# Altium PCB Dragonfleye.PcbDoc
Units mil, origin at the board's own origin, x right, y up, seen from the top; angles counter-clockwise.
Board outline 787.11 x 669.29 mil, 4 copper layers (Component Side, Ground Plane, Power Plane, Solder Side), stack 66.034 mil thick; 62 components, 67 nets, 308 pads, 102 vias.
Unrouted connection lines stored in the file: 105.
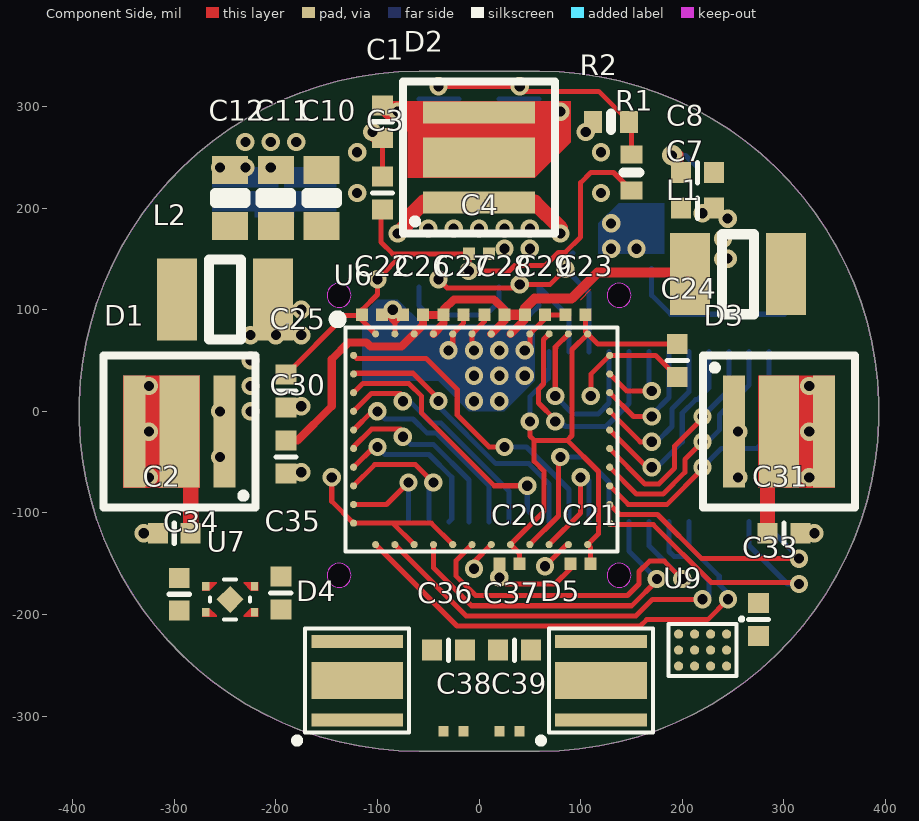
[diagram p0: Component Side view]
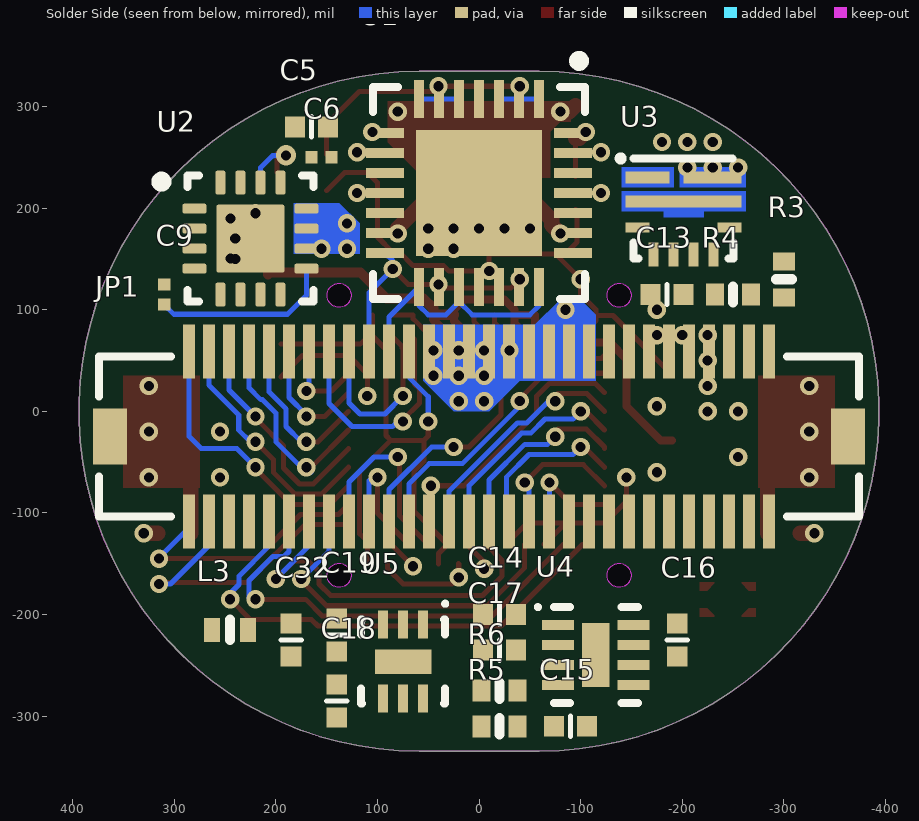
[diagram p1: Solder Side view, seen from below]
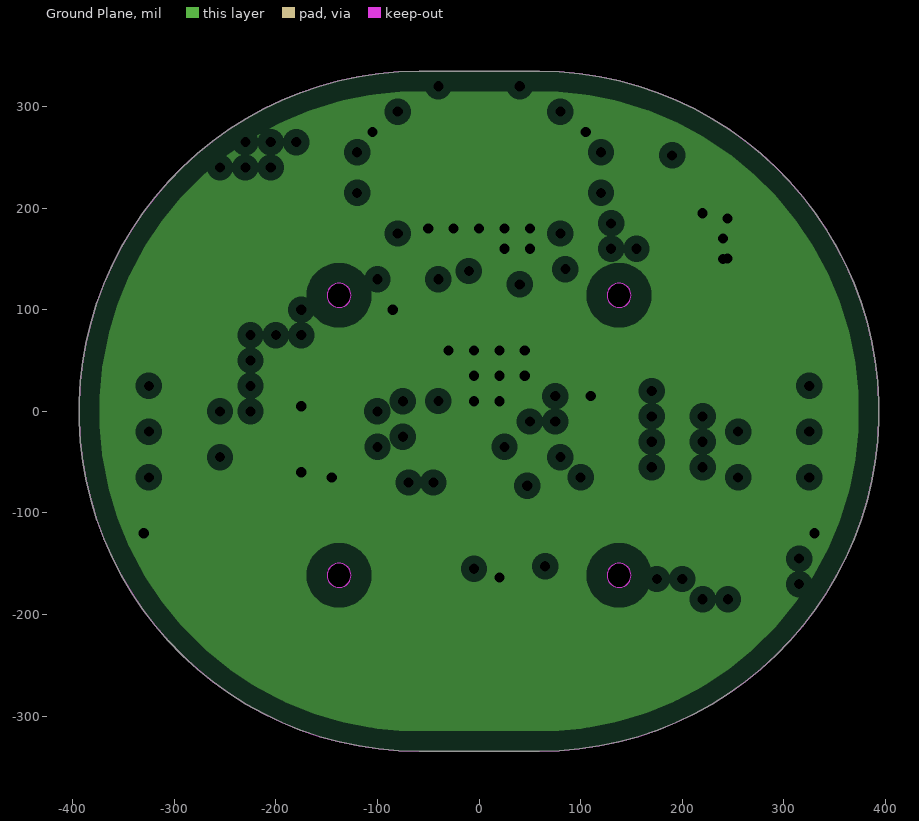
[diagram p2: Ground Plane, clearances drawn from the general rule]
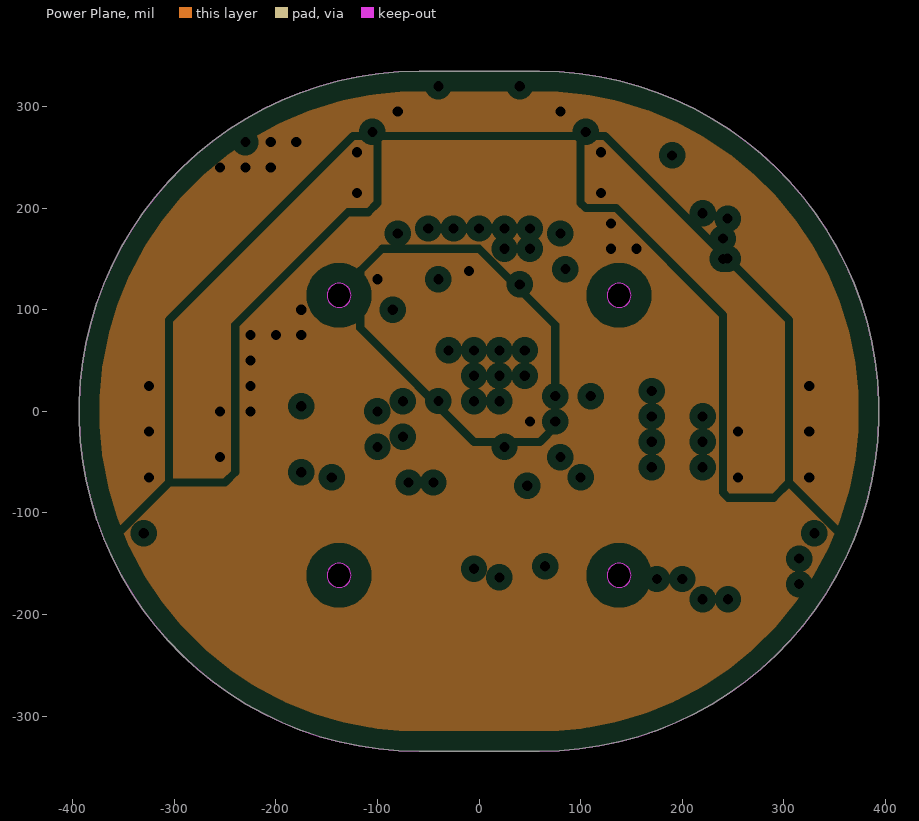
[diagram p3: Power Plane, clearances drawn from the general rule]

## Layer stack, top to bottom
Top Solder: solder mask 0.4, Solder Resist, Dk 3.5
Component Side: signal copper 1.4
Dielectric 1: core 6.7, FR-4, Dk 4.8
Ground Plane: plane copper 1.417, net GND
Dielectric 3: prepreg 47, Dk 4.2
Power Plane: plane copper 1.417, net (Multiple Nets)
Dielectric 4: core 6.7, Dk 4.2
Solder Side: signal copper 1.4
Bottom Solder: solder mask 0.4, Solder Resist, Dk 3.5

## Board outline
-59.06,-334.65 59.06,-334.65 ccw(c59.06,0) 59.06,334.65 -59.06,334.65 ccw(c-59.06,0)
cut-out: -149.61,114.17 ccw(c-137.8,114.17) -137.8,102.36 ccw(c-137.8,114.17) -125.98,114.17 ccw(c-137.8,114.17) -137.8,125.98 ccw(c-137.8,114.17)
cut-out: 125.98,114.17 ccw(c137.8,114.17) 137.8,102.36 ccw(c137.8,114.17) 149.61,114.17 ccw(c137.8,114.17) 137.8,125.98 ccw(c137.8,114.17)
cut-out: 125.98,-161.42 ccw(c137.8,-161.42) 137.8,-173.23 ccw(c137.8,-161.42) 149.61,-161.42 ccw(c137.8,-161.42) 137.8,-149.61 ccw(c137.8,-161.42)
cut-out: -149.61,-161.42 ccw(c-137.8,-161.42) -137.8,-173.23 ccw(c-137.8,-161.42) -125.98,-161.42 ccw(c-137.8,-161.42) -137.8,-149.61 ccw(c-137.8,-161.42)

## Design rules (kind name [scope] priority, off if disabled: settings)
Clearance [All] p1: gap=5 ignorepadtopadclearanceinfootprint=FALSE
ComponentClearance [All] p1: gap=5 collisioncheckmode=3 verticalgap=5 showdistances=FALSE
PlaneClearance [All] p1: clearance=8
PlaneConnect [All] p1: planeconnectstyle=Direct reliefexpansion=20 reliefentries=4 reliefconductorwidth=10 reliefairgap=10
PolygonConnect [All] p1: connectstyle=Relief reliefconductorwidth=10 reliefentries=4 polygonreliefangle="90 Angle" airgapwidth=10
RoutingVias [All] p1: holewidth=10 width=18 viastyle="Through Hole" minholewidth=10 minwidth=18 maxholewidth=10 maxwidth=20
SolderMaskExpansion SolderMaskExpansion_Via [IsVia] p1: expansion=1 soldermaskfromhole=TRUE
SolderMaskExpansion [All] p2: expansion=3
Width [All] p1: maxlimit=20 minlimit=5 preferedwidth=5
27 further rules are at their usual default settings.

## Classes and differential pairs
component class U_Sensor-RGB: C36 C37 C38 C39 U8
component class U_Sensor-ToF: C20 C21 C22 C23 C24 C25 C26 C27 C28 C29 C30 U6
component class U_Power: C5 C6 C7 C8 C9 C10 C11 C12 C13 C14 C15 C16 C17 C18 C19 C34 C35 L1 L2 R3 R4 R5 R6 U2 U3 U4 U5 U7
component class U_LEDs: C1 C2 C3 C4 C31 C32 C33 D1 D2 D3 D4 D5 L3 R1 R2 U1 U9
component class U_Connector: JP1

## Components (designator, comment, footprint, x,y, rotation, side; value= is the part's Value field where it differs from the comment)
C1 "10uF 6.3V 0402" C0402[1005X55] -95,285 r90 top value=10uF
C2 "10uF 6.3V 0402" C0402[1005X55] -300,-120 r0 top value=10uF
C3 "10uF 6.3V 0402" C0402[1005X55] -95,215 r270 top value=10uF
C4 "0.1uF 6.3V 0201" C0201[0603X30]#1 0,155 r180 top value=0.1uF
C5 "10uF 6.3V 0402" C0402[1005X55] 165,280 r180 bottom value=10uF
C6 "0.1uF 6.3V 0201" C0201[0603X30]#1 155,250 r180 bottom value=0.1uF
C7 "10uF 6.3V 0402" C0402[1005X55] 215,200 r180 top value=10uF
C8 "10uF 6.3V 0402" C0402[1005X55] 215,235 r180 top value=10uF
C9 "3.3nF 6.3V 0201" C0201[0603X30]#1 310,115 r270 bottom value=3.3nF
C10 "22uF 6.3V 0603" C0603[1608X92] -155,210 r90 top value=22uF
C11 "22uF 6.3V 0603" C0603[1608X92] -200,210 r90 top value=22uF
C12 "22uF 6.3V 0603" C0603[1608X92] -245,210 r90 top value=22uF
C13 "10uF 6.3V 0402" C0402[1005X55] -185,115 r0 bottom value=10uF
C14 "4.7uF 6.3V 0402" C0402[1005X55] -20,-200 r180 bottom value=4.7uF
C15 "2.2uF 6.3V 0402" C0402[1005X55] -90,-310 r0 bottom value=2.2uF
C16 "1uF 6.3V 0402" C0402[1005X55] -195,-225 r90 bottom value=1uF
C17 "4.7uF 6.3V 0402" C0402[1005X55] -20,-235 r180 bottom value=4.7uF
C18 "2.2uF 6.3V 0402" C0402[1005X55] 140,-285 r270 bottom value=2.2uF
C19 "2.2uF 6.3V 0402" C0402[1005X55] 140,-220 r90 bottom value=2.2uF
C20 "0.1uF 6.3V 0201" C0201[0603X30]#1 30,-150 r0 top value=0.1uF
C21 "0.1uF 6.3V 0201" C0201[0603X30]#1 100,-150 r0 top value=0.1uF
C22 "0.1uF 6.3V 0201" C0201[0603X30]#1 -105.16,95 r180 top value=0.1uF
C23 "0.1uF 6.3V 0201" C0201[0603X30]#1 95,95 r0 top value=0.1uF
C24 "10uF 6.3V 0402" C0402[1005X55] 195,50 r90 top value=10uF
C25 "10uF 6.3V 0402" C0402[1005X55] -190,20 r90 top value=10uF
C26 "0.1uF 6.3V 0201" C0201[0603X30]#1 -65,95 r0 top value=0.1uF
C27 "0.1uF 6.3V 0201" C0201[0603X30]#1 -25,95 r180 top value=0.1uF
C28 "0.1uF 6.3V 0201" C0201[0603X30]#1 15,95 r0 top value=0.1uF
C29 "0.1uF 6.3V 0201" C0201[0603X30]#1 55,95 r180 top value=0.1uF
C30 "10uF 6.3V 0402" C0402[1005X55] -190,-45 r90 top value=10uF
C31 "10uF 6.3V 0402" C0402[1005X55] 300,-120 r180 top value=10uF
C32 "10uF 6.3V 0402" C0402[1005X55] 185,-225 r90 bottom value=10uF
C33 "10uF 6.3V 0402" C0402[1005X55] 275,-205 r270 top value=10uF
C34 "2.2uF 6.3V 0402" C0402[1005X55] -295,-180 r270 top value=2.2uF
C35 "2.2uF 6.3V 0402" C0402[1005X55] -195,-178.86 r270 top value=2.2uF
C36 "10uF 6.3V 0402" C0402[1005X55] -30,-235 r0 top value=10uF
C37 "10uF 6.3V 0402" C0402[1005X55] 35,-235 r180 top value=10uF
C38 "0.1uF 6.3V 0201" C0201[0603X30]#2 -25,-315 r0 top value=0.1uF
C39 "0.1uF 6.3V 0201" C0201[0603X30]#2 30,-315 r180 top value=0.1uF
D1 "SFH 4715AS-EA" "SFH 4715AS" -295,-20 r270 top
D2 "SFH 4715AS-EA" "SFH 4715AS" 0,250 r180 top
D3 "SFH 4715AS-EA" "SFH 4715AS" 295,-20 r90 top
D4 "XBHAWT-00-0000-000LT50E3" XBHAWT -120,-265 r270 top
D5 "XBHAWT-00-0000-000LT50E3" XBHAWT 120,-265 r270 top
JP1 "JST_JMD_60_RECEPTACLE" JST-JMD-60-SMD-RECEPTACLE 0,-25 r180 bottom
L1 "2.2uH" IND1008 255,135 r180 top
L2 "1uH" IND1008 -250,110 r180 top
L3 "1uH" IND0402 245,-215 r180 bottom
R1 "10K 1% 0402" R0402[1005] 150,235 r270 top value=10K
R2 "100K 1% 0402" R0402[1005] 130,285 r0 top value=100K
R3 "1M 1% 0402" R0402[1005] -300,130 r90 bottom value=1M
R4 "300K 1% 0402" R0402[1005] -250,115 r180 bottom value=300K
R5 "75K 1% 0402" R0402[1005] -20,-310 r180 bottom value=75K
R6 "51K 1% 0402" R0402[1005] -20,-275 r0 bottom value=51K
U1 "iC-HG" QFN-28 0,215 r270 bottom
U2 "TPS62131RGTR" RGT0016C_V 225,170 r180 bottom
U3 "TPS61236PRWLR" VQFN-9 -201.46,199.68 r180 bottom
U4 "LM27761DSGR" WSON-8 -115,-240 r180 bottom
U5 "LT3009EDC-3.3#TRMPBF" LT-DC6-6_V 74.69,-246.42 r270 bottom
U6 "MLX75023RTF-BAA-001-SP" BGA-44 2.53,-27.47 r0 top
U7 "TLV74228PDQNR" X2SON-4 -245,-185 r180 top
U9 "LM3644TTYFFR" BGA-12 220,-235 r270 top

## Footprints (in the part's own frame and the unit in brackets; to place one, negate y for a bottom-side part, rotate by r counter-clockwise, add the part's x,y. Pads: shape width x height; smd on the part's side, far side on the other; paste and mask are expansions set on the pad)
BGA-12 [mm] "BGA, 12-Leads, Body 1.28x1.66mmx0.63mm, Pitch 0.40mm"
  round 0.23 smd: A1(-0.4,0.6) A2(0,0.6) A3(0.4,0.6) B1(-0.4,0.2) B2(0,0.2) B3(0.4,0.2) C1(-0.4,-0.2) C2(0,-0.2) C3(0.4,-0.2) D1(-0.4,-0.6) D2(0,-0.6) D3(0.4,-0.6)
  silkscreen extent -0.81,-0.85 0.65,1.01, body extent -0.64,-0.83 0.64,0.83, height 0.63
BGA-44 [mm] "BGA, 44-Leads, Body 6.61x5.48mmx0.50mm, Pitch 0.48mm"
  round 0.18 smd: 1(-3.201,2.097) 2(-3.201,1.631) 3(-3.201,1.165) 4(-3.201,0.699) 5(-3.201,0.233) 6(-3.201,-0.233) 7(-3.201,-0.699) 8(-3.201,-1.165) 9(-3.201,-1.631) 10(-3.201,-2.097) 11(-2.651,-2.634) 12(-2.169,-2.634) 13(-1.687,-2.634) 14(-1.205,-2.634) 15(-0.723,-2.634) 16(-0.241,-2.634) 17(0.241,-2.634) 18(0.723,-2.634) 19(1.205,-2.634) 20(1.687,-2.634) 21(2.169,-2.634) 22(2.651,-2.634) 23(3.201,-2.097) 24(3.201,-1.631) 25(3.201,-1.165) 26(3.201,-0.699) 27(3.201,-0.233) 28(3.201,0.233) 29(3.201,0.699) 30(3.201,1.165) 31(3.201,1.631) 32(3.201,2.097) 33(2.651,2.634) 34(2.169,2.634) 35(1.687,2.634) 36(1.205,2.634) 37(0.723,2.634) 38(0.241,2.634) 39(-0.241,2.634) 40(-0.723,2.634) 41(-1.205,2.634) 42(-1.687,2.634) 43(-2.169,2.634) 44(-2.651,2.634)
  silkscreen extent -3.7,-2.8 3.4,3.1, body extent -3.3,-2.74 3.3,2.74, height 0.5
C0201[0603X30]#1 [mm] "Chip Capacitor, Body 0.6x0.3mm"
  rect 0.3x0.31 smd: 1(-0.25,0) 2(0.25,0)
  body extent -0.25,-0.13 0.25,0.13, height 0.3
C0201[0603X30]#2 [mm] "Chip Capacitor, Body 0.6x0.3mm"
  rect 0.25x0.26 smd: 1(-0.25,0) 2(0.25,0)
  body extent -0.25,-0.13 0.25,0.13, height 0.3
C0402[1005X55] [mm] "Chip Capacitor, Body 1.0x0.5mm"
  rect 0.5x0.52 smd: 1(-0.41,0) 2(0.41,0)
  silkscreen extent 0,-0.25 0,0.25, body extent -0.5,-0.25 0.5,0.25, height 0.56
C0603[1608X92] [mm] "Chip Capacitor, Body 1.6x0.8mm"
  rect 0.7x0.9 smd: 1(-0.7,0) 2(0.7,0)
  silkscreen extent -0.13,-0.38 0.13,0.38, body extent -0.8,-0.4 0.8,0.4, height 0.93
IND0402 [mm] "Chip Inductor, 0402 package"
  rect 0.4x0.6 smd: 1(-0.45,0) 2(0.45,0)
  silkscreen extent 0,-0.25 0,0.25, body extent -0.5,-0.25 0.5,0.25, height 0.35
IND1008 [mm] "Chip Inductor Body 2.5x2.0mm"
  rect 1x2.05 smd: 1(-1.2,0) 2(1.2,0)
  silkscreen extent -0.4,-1 0.4,1, body extent -1,-0.63 1,0.63, height 0.85
JST-JMD-60-SMD-RECEPTACLE [mm]
  rect 0.85x1.4 smd: 0(-9.225,0) 0(9.225,0)
  rect 0.3x1.35 smd: 1(7.25,2.125) 1(7.25,2.125) 2(6.75,2.125) 3(6.25,2.125) 4(5.75,2.125) 5(5.25,2.125) 6(4.75,2.125) 7(4.25,2.125) 8(3.75,2.125) 9(3.25,2.125) 10(2.75,2.125) 11(2.25,2.125) 12(1.75,2.125) 13(1.25,2.125) 14(0.75,2.125) 15(0.25,2.125) 16(-0.25,2.125) 17(-0.75,2.125) 18(-1.25,2.125) 19(-1.75,2.125) 20(-2.25,2.125) 21(-2.75,2.125) 22(-3.25,2.125) 23(-3.75,2.125) 24(-4.25,2.125) 25(-4.75,2.125) 26(-5.25,2.125) 27(-5.75,2.125) 28(-6.25,2.125) 29(-6.75,2.125) 30(-7.25,2.125) 31(-7.25,-2.125) 31(-7.25,-2.125) 32(-6.75,-2.125) 33(-6.25,-2.125) 34(-5.75,-2.125) 35(-5.25,-2.125) 36(-4.75,-2.125) 37(-4.25,-2.125) 38(-3.75,-2.125) 39(-3.25,-2.125) 40(-2.75,-2.125) 41(-2.25,-2.125) 42(-1.75,-2.125) 43(-1.25,-2.125) 44(-0.75,-2.125) 45(-0.25,-2.125) 46(0.25,-2.125) 47(0.75,-2.125) 48(1.25,-2.125) 49(1.75,-2.125) 50(2.25,-2.125) 51(2.75,-2.125) 52(3.25,-2.125) 53(3.75,-2.125) 54(4.25,-2.125) 55(4.75,-2.125) 56(5.25,-2.125) 57(5.75,-2.125) 58(6.25,-2.125) 59(6.75,-2.125) 60(7.25,-2.125)
  silkscreen extent -9.5,-2 9.5,2, body extent -9.55,-2.5 9.55,2.5, height 3.05
LT-DC6-6_V [mm] "SON, 6-Leads, Body 2x2mm, Pitch 0.5mm, Thermal Pad 1.42x0.61mm"
  rect 0.7x0.25 smd mask+0.102: 1(-0.925,0.5) 2(-0.925,0) 4(0.925,-0.5) 5(0.925,0)
  rect 0.7x0.25 smd paste+0 mask+0.102: 3(-0.925,-0.5)
  rect 0.7x0.25 smd: 6(0.925,0.5)
  rect 0.61x1.42 smd: 7(0,0)
  silkscreen extent -1.5,-1.05 1.05,1.1, body extent -1,-1 1,1, height 0.8
QFN-28 [mm] "QFN, 28-Leads, Body 5.00x5.00mm, Pitch 0.50mm, Thermal Pad 3.15x3.15mm, IPC Medium Density"
  rect 0.95x0.25 smd: 1(-2.35,1.5) 2(-2.35,1) 3(-2.35,0.5) 4(-2.35,0) 5(-2.35,-0.5) 6(-2.35,-1) 7(-2.35,-1.5) 15(2.35,-1.5) 16(2.35,-1) 17(2.35,-0.5) 18(2.35,0) 19(2.35,0.5) 20(2.35,1) 21(2.35,1.5)
  rect 0.25x0.95 smd: 8(-1.5,-2.35) 9(-1,-2.35) 10(-0.5,-2.35) 11(0,-2.35) 12(0.5,-2.35) 13(1,-2.35) 14(1.5,-2.35) 22(1.5,2.35) 23(1,2.35) 24(0.5,2.35) 25(0,2.35) 26(-0.5,2.35) 27(-1,2.35) 28(-1.5,2.35)
  rect 3.15x3.15 smd: 29(0,0)
  silkscreen extent -3.42,-2.65 2.65,2.65, body extent -2.51,-2.51 2.51,2.51, height 0.9
R0402[1005] [mm] "Chip Resistor, Body 1.0x0.5mm"
  rect 0.45x0.55 smd: 1(-0.45,0) 2(0.45,0)
  silkscreen extent 0,-0.2 0,0.2, body extent -0.5,-0.25 0.5,0.25, height 0.35
RGT0016C_V [mm] "QFN, 16-Leads, Body 3x3mm, Pitch 0.5mm, Thermal Pad 1.65x1.65mm"
  rrect40% 0.6x0.25 smd: 1(-1.4,0.75) 2(-1.4,0.25) 3(-1.4,-0.25) 4(-1.4,-0.75) 9(1.4,-0.75) 10(1.4,-0.25) 11(1.4,0.25) 12(1.4,0.75)
  rrect40% 0.25x0.6 smd: 5(-0.75,-1.4) 6(-0.25,-1.4) 7(0.25,-1.4) 8(0.75,-1.4) 13(0.75,1.4) 14(0.25,1.4) 15(-0.25,1.4) 16(-0.75,1.4)
  rrect6% 1.55x1.55 on Bottom Paste: 17(0,0)
  rrect6% 1.7x1.7 smd paste-0.85: 17(0,0)
  silkscreen extent -2.35,-1.57 1.57,1.58, body extent -1.5,-1.5 1.5,1.5, height 1
"SFH 4715AS" [mm]
  rect 2.8x1 smd: A(0,0)
  rect 2.8x0.55 smd: A(0,-1.125) C(0,1.125)
  silkscreen extent -1.9,-1.9 1.9,1.9, body extent -1.92,-1.92 1.93,1.93, height 2.4
VQFN-9 [mm]
  rect 1.1x0.3 smd: 1(-0.9,0.77)
  rect 2.9x0.3 smd: 2(0,0.17)
  rect 0.6x0.25 smd: 3(-1.15,-0.475) 8(1.15,-0.475)
  rect 0.25x0.6 smd: 4(-0.75,-1.15) 5(-0.25,-1.15) 6(0.25,-1.15) 7(0.75,-1.15)
  rect 1.45x0.3 smd: 9(0.725,0.77)
  Component Side region: -1.55,0.425 -1.55,-0.075 -0.494,-0.075 -0.494,-0.22 0.494,-0.22 0.494,-0.075 1.55,-0.075 1.55,0.425
  Component Side region: -0.1,1.025 1.55,1.025 1.55,0.525 -0.1,0.525
  Component Side region: -1.55,1.025 -0.25,1.025 -0.25,0.525 -1.55,0.525
  silkscreen extent -1.63,-1.25 1.25,1.3, body extent -1.25,-1.25 1.25,1.25, height 1
WSON-8 [mm] "SON, 8-Leads, Body 2.00x2.00mm, Pitch 0.50mm, Thermal Pad 1.60x0.69mm, IPC Medium Density"
  rect 0.8x0.25 smd mask+0.08: 1(-0.945,0.75) 2(-0.945,0.25) 3(-0.945,-0.25) 4(-0.945,-0.75) 5(0.945,-0.75) 6(0.945,-0.25) 7(0.945,0.25) 8(0.945,0.75)
  rect 0.69x1.6 smd paste-0.345 mask+0.08: 9(0,0)
  silkscreen extent -1.5,-1.2 1.05,1.25, body extent -1.05,-1.05 1.05,1.05, height 0.8
X2SON-4 [mm]
  rect 0.18x0.21 smd: 1(-0.61,0.325) 2(-0.61,-0.325) 3(0.61,-0.325) 4(0.61,0.325)
  rect 0.48x0.48 smd rot 45: 5(0,0)
  Component Side region: -0.7,-0.43 -0.34,-0.43 -0.34,-0.4 -0.52,-0.22 -0.7,-0.22
  Component Side region: 0.7,-0.43 0.34,-0.43 0.34,-0.4 0.52,-0.22 0.7,-0.22
  Component Side region: 0.7,0.43 0.34,0.43 0.34,0.4 0.52,0.22 0.7,0.22
  Component Side region: -0.7,0.43 -0.34,0.43 -0.34,0.4 -0.52,0.22 -0.7,0.22
  silkscreen extent -0.5,-0.5 0.5,0.5, body extent -0.5,-0.5 0.5,0.5, height 0.4
XBHAWT [mm]
  rect 0.325x2.29 smd: A(-0.982,0) C(0.982,0)
  rect 0.92x2.29 smd: C(0,0)
  silkscreen extent -1.3,-1.55 1.55,1.3, body extent -1.22,-1.22 1.23,1.23, height 2.28

## Part data
C1 C2 C3 C5 C7 C8 C13 C24 C25 C30 C31 C32 C33 C36 C37: library part CAP_10uF_6.3V_0402_20%, "10uF 6.3V 20% 0402 (1005 Metric)", Manufacturer=Murata, PartNumber=GRM155R60J106ME44D, Tolerance=20%, Voltage=6.3V, Mounting Technology="Surface Mount", PackageDescription="0402 (1005 Metric)", PackageReference=0402
C4 C6 C20 C21 C22 C23 C26 C27 C28 C29 C38 C39: library part CAP_0.1uF_6.3V_0201_10%, "0.1uF 6.3V 10% 0201 (0603 Metric)", Manufacturer=Murata, PartNumber=GRT033R60J104KE01D, Tolerance=10%, Voltage=6.3V, Mounting Technology="Surface Mount", PackageDescription="0201 (0603 Metric)", PackageReference=0201
C9: library part CAP_3,3nF_6.3V_0201_10%, "3.3nF 6.3V 10% 0201 (0603 Metric)", Manufacturer=Murata, PartNumber=GRM033R70J332KA01D, Tolerance=10%, Voltage=6.3V, Mounting Technology="Surface Mount", PackageDescription="0201 (0603 Metric)", PackageReference=0201
C10 C11 C12: library part CAP_22uF_6.3V_0603_10%, "22uF 6.3V 10% 0603 (1608 Metric)", Manufacturer=Murata, PartNumber=GRT188R60J226ME13D, Tolerance=10%, Voltage=6.3V, Mounting Technology="Surface Mount", PackageDescription="0603 (1608 Metric)", PackageReference=0603
C14 C17: library part CAP_4.7uF_6.3V_0402_20%, "4.7uF 6.3V 20% 0402 (1005 Metric)", Manufacturer=Murata, PartNumber=GRM155R60J475ME47D, Tolerance=20%, Voltage=6.3V, Mounting Technology="Surface Mount", PackageDescription="0402 (1005 Metric)", PackageReference=0402
C15 C18 C19 C34 C35: library part CAP_2.2uF_6.3V_0402_20%, "2.2uF 6.3V 20% 0402 (1005 Metric)", Manufacturer=Murata, PartNumber=GRM155R60J225ME15D, Tolerance=20%, Voltage=6.3V, Mounting Technology="Surface Mount", PackageDescription="0402 (1005 Metric)", PackageReference=0402
C16: library part CAP_1uF_6.3V_0402_10%, "1uF 6.3V 10% 0402 (1005 Metric)", Manufacturer=Murata, PartNumber=GRM155R70J105KA12D, Tolerance=10%, Voltage=6.3V, Mounting Technology="Surface Mount", PackageDescription="0402 (1005 Metric)", PackageReference=0402
D1 D2 D3: Manufacturer=Osram, Package Reference=SMD-3, Mounting Technology="Surface Mount", PartNumber="SFH 4715AS-EA"
D4 D5: Manufacturer="Cree, Inc.", Mounting Technology="Surface Mount", PackageReference=SMD-2, PartNumber=XBHAWT-00-0000-000LT50E3
JP1: Manufacturer="JST Sales America, Inc.", PartNumber=60R-JMDSS-G-1-TF(S), Mounting Technology="Surface Mount", PackageReference=JMD-60
L1: library part IND_2.2uH_3.3A_1008_20%, "2.2uH 20% 3.3A 1008", Current=3.3A, Manufacturer=Murata, PartNumber=DFE252012F-2R2M=P2, Mounting Technology="Surface Mount", PackageDescription="1008 (2520 metric)", PackageReference=1008
L2: library part IND_1uH_4.7A_1008_20%, "1uH 20% 4.7A 1008", Current=4.7A, Manufacturer=Murata, PartNumber=DFE252012F-2R2M=P2, Mounting Technology="Surface Mount", PackageDescription="1008 (2520 metric)", PackageReference=1008
L3: library part IND_1uH_0.5A_0402_20%, "1uH 20% 0.5A 0402", Current=0.5A, Manufacturer=Murata, PartNumber=MLP1005M1R0DT0S1, Mounting Technology="Surface Mount", PackageDescription="0402 (2012 metric)", PackageReference=0402
R1: library part RES_10K_0402_1%, "10K 0.063W 1% 0402 (1005 Metric)", Manufacturer="KOA Speer", PartNumber=RK73H1ETTP1002F, Power=0.063W, Tolerance=1%, ComponentLink1Description=Datasheet, ComponentLink1URL=http://www.koaspeer.com/catimages/Products/RK73H/RK73H.pdf, Mounting Technology="Surface Mount", PackageDescription="0402 (1005 Metric)", PackageReference=0402
R2: library part RES_100K_0402_1%, "100K 0.063W 1% 0402 (1005 Metric)", Manufacturer="KOA Speer", PartNumber=RK73H1ETTP1003F, Power=0.063W, Tolerance=1%, ComponentLink1Description=Datasheet, ComponentLink1URL=http://www.koaspeer.com/catimages/Products/RK73H/RK73H.pdf, Mounting Technology="Surface Mount", PackageDescription="0402 (1005 Metric)", PackageReference=0402
R3: library part RES_1M_0402_1%, "1M 0.063W 1% 0402 (1005 Metric)", Manufacturer="KOA Speer", PartNumber=RK73H1ETTP1004F, Power=0.063W, Tolerance=1%, ComponentLink1Description=Datasheet, ComponentLink1URL=http://www.koaspeer.com/catimages/Products/RK73H/RK73H.pdf, Mounting Technology="Surface Mount", PackageDescription="0402 (1005 Metric)", PackageReference=0402
R4: library part RES_300K_0402_1%, "300K 0.063W 1% 0402 (1005 Metric)", Manufacturer="KOA Speer", PartNumber=RK73H1ETTP3003F, Power=0.063W, Tolerance=1%, ComponentLink1Description=Datasheet, ComponentLink1URL=http://www.koaspeer.com/catimages/Products/RK73H/RK73H.pdf, Mounting Technology="Surface Mount", PackageDescription="0402 (1005 Metric)", PackageReference=0402
R5: library part RES_75K_0402_1%, "75K 0.063W 1% 0402 (1005 Metric)", Manufacturer="KOA Speer", PartNumber=RK73H1ETTP7502F, Power=0.063W, Tolerance=1%, ComponentLink1Description=Datasheet, ComponentLink1URL=http://www.koaspeer.com/catimages/Products/RK73H/RK73H.pdf, Mounting Technology="Surface Mount", PackageDescription="0402 (1005 Metric)", PackageReference=0402
R6: library part RES_51K_0402_1%, "51K 0.063W 1% 0402 (1005 Metric)", Manufacturer="KOA Speer", PartNumber=RK73H1ETTP5102F, Power=0.063W, Tolerance=1%, ComponentLink1Description=Datasheet, ComponentLink1URL=http://www.koaspeer.com/catimages/Products/RK73H/RK73H.pdf, Mounting Technology="Surface Mount", PackageDescription="0402 (1005 Metric)", PackageReference=0402
U1: library part "iC-HG QFN28-5x5", Manufacturer=iC-Haus, Mounting Technology="Surface Mount", PackageReference=QFN-28, PartNumber="iC-HG QFN28-5x5"
U2: library part CMP-0323-00113-2, "Buck Step Down Regulator with 3 to 17 V Input and 1.8 V Output, -40 to 85 degC, 16-Pin QFN (RGT), Green (RoHS & no Sb/Br)", Manufacturer="Texas Instruments", Rating=Catalog, Switch Current Limit(Typ)(A)=4.2, Code_JEDEC=MO-220, ComponentLink1Description=Datasheet, ComponentLink1URL=http://www.ti.com/general/docs/lit/getliterature.tsp?genericPartNumber=TPS62131&fileType=pdf, ComponentLink2Description="URL Link1", ComponentLink2URL="Samples URL:http://www.ti.com/product/tps62131#samples", DatasheetVersion=SLVSAG7, Duty Cycle(Max)(%)=100, Eco-Plan="Green (RoHS & no Sb/Br)", Iout(Max)(A)=3, Iq(Typ)(mA)=0.017, Mounting Technology="Surface Mount", PackageDescription="16-Pin Plastic Quad Flat No-Lead, 3 x 3 mm Body, 0.5 mm Pitch, 1.7 x 1.7 mm Exposed Pad", PackageReference=RGT0016C, PackageVersion="revH, Oct-2011", PartNumber=TPS62131RGTR, Preset Vout(V)=1.8, Regulated Outputs(#)=1, SubFamily="Step-Down Regulator", Synchronous Rectification=TRUE, Topology=Buck, Vin(Max)(V)=17, Vin(Min)(V)=3, Vout(Max)(V)=1.8, Vout(Min)(V)=1.8
U3: Manufacturer="Texas Instruments", Mounting Technology="Surface Mount", PackageReference=VQFN-9, PartNumber=TPS61236PRWLR
U4: "Switching Voltage Regulators Switch Cap Boost", Manufacturer="Texas Instruments", Mounting Technology="Surface Mount", PackageReference=WSON-8, PartNumber=LM27761DSGR
U5: library part CMP-0476-00025-3, "3 uA IQ, 20 mA Low Dropout Linear Regulator, 1.6 to 20 V Vin, 3.3 V Vout, 6-pin SON (DC6-6), -40 to 125 degC, Pb-Free, Mini Tape and Reel", Dropout Voltage(V)=0.28, Manufacturer="Linear Technology", Output Voltage="3.3 V", Shutdown Current(uA)=1, Code_JEDEC=MO-229, ComponentLink1Description="Manufacturer URL", ComponentLink1URL=http://www.linear.com/, ComponentLink2Description=Datasheet, ComponentLink2URL=http://cds.linear.com/docs/en/datasheet/3009fd.pdf, ComponentLink3Description="Package Specification", ComponentLink3URL=http://cds.linear.com/docs/en/packaging/DFN_6_05-08-1703.pdf, DatasheetVersion="Rev. D", Discrete Pass Element=no, Iout(mA)=20, Isupply(mA)=0.003, Mounting Technology="Surface Mount", Noise(uV)=150, Number of Outputs=1, PackageDescription="6-Pin Plastic DFN, Body 2 x 2 mm, Pitch 0.5 mm", PackageReference=DC6-6, PackageVersion="Rev. B, 06/2010", Packing="Mini Tape and Reel", PartNumber=LT3009EDC-3.3#TRMPBF, PSRR(dB)=61, RoHS=TRUE, Vin Max(V)=20, Vin Min(V)=1.6
U6: Manufacturer=Melexis, Mounting Technology="Surface Mount", PackageReference=BGA-44, PartNumber=MLX75023RTF-BAA-001-SP
U7: "LDO Voltage Regulators 200mA Small-Size Low-Dropout (LDO) Linear Voltage Regulator 4-X2SON -40 to 125", Manufacturer="Texas Instruments", PartNumber=TLV74218PDQNR, Mounting Technology="Surface Mount", PackageReference=X2SON-4
U9: "LED Lighting Drivers 1.5 Amp LED driver", Manufacturer="Texas Instruments", Mounting Technology="Surface Mount", PackageReference=BGA-12, PartNumber=LM3644TTYFFR

## Via types
v1: diameter 18, hole 10, Component Side to Solder Side, 101 vias
v2: diameter 20, hole 10, Component Side to Solder Side, 1 vias

## Nets (pads, with @x,y where several pads share a name; then routed paths per layer and width w, separated by ;. In a path a pad name is that pad's centre, name@x,y a point inside that pad or via, vN(x,y) a via of type N, cw(c..) or ccw(c..) an arc to the next point about the centre after c; other vN are vias at no path point)
2V8: C35.2 C36.2 C37.2 U7.1
3V3: C3.2 C4.2 C20.2 C21.2 C22.2 C23.2 C24.2 C25.2 C34.2 JP1.19 R1.2 U1.18 U1.19 U6.18 U6.22 U6.33 U6.44 U7.3 U7.4 U9.C2 U9.C3 | length 1227.6
  Component Side w5: C25.2 -131.91,94.23 -115.77,94.23 C22.2 ; U6.44 -115,89.39 C22.2 ; C3.2 -96.5,197.36 -96.5,166.5 -85,155 -75,155 ; C20.2 39.84,-140.02 U6.18 63.91,-98.26 63.91,-58.91 54.24,-49.24 54.24,-28.5 ; v1@53.5,-8.5 50,-5 v1(50,-10) 50,-24.26 54.24,-28.5 ; C23.2 104.84,78.29 U6.33 ; C21.2 109.84,-134.11 U6.22 117.52,-120.56 117.52,-59.18 86.83,-28.5 ; R1.2 132.28,235 110,235 100,225 100,171.67 84.83,156.5 78.17,156.5 65.17,143.5 35.17,143.5 29.77,138.1 v1(-10.07,138.1) -9.84,138.33 C4.2 -75,155 ; C24.2 133.14,66.14 117,66.13 U6.33 ; C22.2 -115,100 -100,115 v1(-100,130) -75,155 ; 54.24,-28.5 86.83,-28.5 ; 86.83,-28.5 91.5,-23.83 91.5,60.82 U6.33
  Solder Side w5: v1(50,-10) 50,14.39 68.17,32.56 68.17,41.5 68.9,41.5 JP1.19
ARRAYBIAS: C15.2 R5.2 U4.4 U6.17 | length 30.9
  Component Side w5: v1(-5,-155) -5,-148.2 U6.17
COLUMN0: JP1.25 U6.30 | length 121.8
  Component Side w5: U6.30 151.95,-5 v1(170,-5)
  Solder Side w5: v1(170,-5) 170,-3.38 187.01,13.63 JP1.25
COLUMN1: JP1.26 U6.29 | length 160.7
  Component Side w5: U6.29 158.61,-30 v1(170,-30)
  Solder Side w5: v1(170,-30) 175,-30 190,-15 190,2.48 206.69,19.17 JP1.26
COLUMN2: JP1.27 U6.28 | length 196
  Component Side w5: U6.28 165.26,-55 v1(170,-55)
  Solder Side w5: v1@165.25,-60 170,-55.25 v1(170,-55) ; v1@177.5,-52.5 200,-30 200,-1.67 213.17,11.5 214.78,11.5 226.38,23.09 JP1.27
COLUMN3: JP1.28 U6.27 | length 223.8
  Component Side w5: U6.27 128.56,-36.89 163.17,-71.5 176.83,-71.5 192.5,-55.83 192.5,-34.17 216.41,-10.25 220,-10.25 v1(220,-5)
  Solder Side w5: v1(220,-5) 246.06,21.06 JP1.28
COLUMN4: JP1.29 U6.26 | length 241.6
  Component Side w5: U6.26 155.07,-81.5 180.98,-81.5 202.5,-59.98 202.5,-47.5 v1(220,-30)
  Solder Side w5: v1(220,-30) 225,-30 236.5,-18.5 236.5,-3.5 265.75,25.75 JP1.29
COLUMN5: JP1.30 U6.25 | length 276.3
  Component Side w5: U6.25 146.72,-91.5 185.12,-91.5 220,-56.62 v1(220,-55)
  Solder Side w5: v1(220,-55) 238.5,-36.5 273.5,-36.5 285.43,-24.57 JP1.30
COLUMN6: JP1.31 U6.24 | length 261.6
  Component Side w5: U6.24 138.37,-101.5 175.64,-101.5 219.14,-145 v1(315,-145) v1@315,-140.47
  Solder Side w5: JP1.31@285.43,-108.66 285.43,-114.57 315,-144.13 v1(315,-145)
COLUMN7: JP1.32 U6.23 | length 299.6
  Component Side w5: U6.23 130.03,-111.5 171.5,-111.5 228.5,-168.5 313.5,-168.5 v1(315,-170)
  Solder Side w5: JP1.32 265.75,-132.06 303.68,-170 v1(315,-170)
CORE_RESET: JP1.40 U6.20 | length 136.1
  Component Side w5: U6.20 100,-100.13 v1(100,-65)
  Solder Side w5: v1(100,-65) 100,-60 108.27,-68.27 JP1.40
DMIX0: JP1.23 U6.35 | length 232.5
  Component Side w5: U6.35 63.5,70.78 63.5,26.83 58.5,21.83 58.5,8.17 75,-8.33 v1(75,-10)
  Solder Side w5: v1(75,-10) 80,-10 85,-15 125,-15 147.64,7.64 JP1.23
DMIX1: JP1.22 U6.34 | length 182.4
  Component Side w5: v1(75,15) 75,61.63 75.83,62.47 75,63.3 U6.34
  Solder Side w5: v1(75,15) 92.5,-2.5 117.25,-2.5 127.95,8.2 JP1.22
GND: C1.1 C2.1 C3.1 C4.1 C5.1 C6.1 C7.1 C8.1 C9.1 C10.1 C11.1 C12.1 C13.1 C14.1 C15.1 C17.1 C18.1 C19.1 C20.1 C21.1 C22.1 C23.1 C24.1 C25.1 C26.1 C27.1 C28.1 C29.1 C30.1 C31.1 C32.1 C33.1 C34.1 C35.1 C36.1 C37.1 C38.1 C39.1 D4.C D5.C JP1.10 JP1.11 JP1.12 JP1.13 JP1.14 JP1.15 JP1.16 JP1.17 JP1.18 R2.1 R4.1 R6.1 U1.4 U1.8 U1.10 U1.12 U1.24 U1.26 U1.28 U1.29 U2.5 U2.6 U2.7 U2.8 U2.15 U2.16 U2.17@225,170 U3.1 U3.4 U3.5 U3.8 U4.2 U4.9 U5.6 U5.7 U6.10 U6.13 U6.15 U6.32 U6.36 U6.39 U6.40 U6.43 U7.2 U7.5 U9.A1 | length 684.1
  Component Side w5: v1(-145,-65) -145,-88.52 U6.10 -47.07,-110.03 U6.15 ; C22.1 -90.87,95 -82.86,86.98 ; C3.1 C1.1 ; -85.01,-110.04 U6.13 ; U6.43 -82.86,86.98 ; C26.1 -82.86,86.98 ; v1@-30,55 -25.93,59.07 U6.40 -15.16,87 C27.1 ; v1@-5,55 -6.95,56.95 U6.39 5.16,88.34 C28.1 ; C20.1 20,-150.16 v1(20,-163.38) 26.66,-170.04 74.71,-170.04 90.16,-154.59 C21.1 ; v1@45,55 49.98,59.98 U6.36 64.84,91.1 C29.1 C23.1 ; v1(110,15) 110,36.53 U6.32 ; U6.32@131.29,55.09 173.77,55.09 C24.1
  Component Side w15: v1(-330,-120) C2.1 ; v1(-105,275) -98.86,268.86 C1.1 ; C31.1 v1(330,-120)
  other v1: -175,-60 -175,5 -5,10 20,10 -5,35 20,35 45,35 -30,60 -5,60 20,60 45,60 -85,100 240,150 244.69,150.32 25,160 50,160 240,170 -50,180 -25,180 0,180 25,180 50,180 244.69,189.68 220,195 105,275
HREF: JP1.59
I2C_SCL: JP1.33 U9.B3
I2C_SDA: JP1.34 U9.A3
LATCH_ENABLE: JP1.49 U6.9 | length 102
  Component Side w5: U6.9 -91.05,-91.68 v1(-69.37,-70)
  Solder Side w5: v1(-69.37,-70) -69.37,-108.19 JP1.49
LEDN: JP1.21 U1.14 U1.16 U1.20 | length 246.1
  Component Side w5: v1(-40,130) -31.6,121.6 36.6,121.6 v1(40,125) 70,125 v1(85,140)
  Solder Side w5: U1.14 85,148.43 v1(85,140) 108.27,116.73 JP1.21
LEDP: JP1.20 U1.15 U1.17 U1.21 | length 263.8
  Solder Side w5: U1.21 -59.06,104.06 -50,95 6.75,95 U1.17@19.69,107.94 ; U1.17 U1.17@19.69,107.94 ; JP1.20 88.58,92.95 U1.15 59.06,104.06 50,95 32.62,95 U1.17@19.69,107.94
MIXH: C7.2 C8.2 C26.2 C27.2 C28.2 C29.2 C30.2 L1.2 U2.14 U6.37 U6.38 U6.41 U6.42 | length 687.1
  Component Side w0: 99.95,109.95 110,120
  Component Side w5: v2(190,251.93) 195.35,251.93 196.14,251.14 198.86,253.86 C8.2
  Component Side w8: C30.2 -178.86,-28.86 -145,5 -145,51.31 -128.68,67.63 -110.98,67.63 -107.03,63.69 -76.43,63.69 U6.42 -55.16,84.95 C26.2 C27.2 ; U6.41 -34.84,86.29 C27.2 ; U6.38 24.84,89.05 C28.2 24.84,100.05 14.79,110.1 -24.79,110.1 -34.84,100.05 C27.2 ; U6.37 45.16,90.39 C29.2
  Component Side w10: C28.2 C29.2 45.16,101.47 54.79,111.1 91.1,111.1 116.67,136.67 207.76,136.67 L1.2
  Solder Side w5: v2(190,251.93) 201.5,251.93 202.28,251.14 203.07,251.93 215.16,239.84 U2.14
NetC9_2: C9.2 U2.9 | length 178
  Solder Side w5: U2.9 169.88,114.29 188.6,95.57 300.41,95.57 C9.2
NetC16_1: C16.1 U4.7
NetC16_2: C16.2 U4.8
NetC17_2: C17.2 U4.3
NetC32_2: C32.2 U9.C1
NetC38_2: C38.2
NetC39_2: C39.2
NetD1_C: D1.C U1.25 U1.27
  other v1: -255,-45 -255,0 -120,215 -120,255
NetD2_C: D2.C U1.13 U1.23 | length 191.8
  Component Side w15: v1(-80,175) -71.5,183.5 -71.5,188.91 -54.7,205.71 D2.C 54.7,205.71 80,180.41 v1(80,175)
NetD3_C: D3.C U1.9 U1.11
  other v1: 255,-65 255,-20 120,215 120,255
NetD4_A: D4.A U9.D1
NetD5_A: D5.A U9.D3
NetJP1_50: JP1.50
NetJP1_51: JP1.51
NetJP1_52: JP1.52
NetJP1_53: JP1.53
NetJP1_54: JP1.54
NetJP1_55: JP1.55
NetJP1_56: JP1.56
NetJP1_57: JP1.57
NetL1_1: L1.1 U2.1 U2.2 U2.3
NetL2_2: L2.2 U3.2
NetL3_2: L3.2 U9.B1
NetR1_1: R1.1 R2.2 U1.1 U1.2 U1.3 U1.5 U1.6 U1.7 | length 314.2
  Component Side w5: v1(-40,320) v1(40,320) 45,315 117.72,315 R2.2 150,282.72 R1.1
  Solder Side w5: U1.1 U1.2 U1.3 ; U1.5 U1.6 U1.7
NetR3_1: R3.1 R4.2 U3.6
NetR5_1: R5.1 R6.2 U4.5
OUT0: JP1.38 U6.14 | length 339.9
  Component Side w5: U6.14 -44.91,-153.98 -7.53,-191.36 150.2,-191.36 176.56,-165 v1(175,-165)
  Solder Side w5: JP1.38 147.64,-137.64 v1(175,-165)
OUT1: JP1.37 U6.16 | length 366.6
  Component Side w5: U6.16 -22.5,-146.72 -22.5,-162.25 -3.39,-181.36 146.06,-181.36 157.5,-169.92 157.5,-157.75 167.75,-147.5 182.25,-147.5 200,-165.25 v1(200,-165)
  Solder Side w5: JP1.37 167.32,-132.32 v1(200,-165)
OUT2: JP1.36 U6.12 | length 443.3
  Component Side w5: U6.12 -12.67,-201.36 154.34,-201.36 170.7,-185 v1(220,-185)
  Solder Side w5: JP1.36 187.01,-137.87 191.88,-142.74 202.74,-142.74 226.38,-166.38 226.38,-183.62 225,-185 v1(220,-185)
OUT3: JP1.35 U6.11 | length 491.6
  Component Side w5: U6.11 -21.65,-211.36 158.64,-211.36 165,-205 225,-205 v1(245,-185)
  Solder Side w5: JP1.35 206.69,-132.74 206.88,-132.74 236.38,-162.24 236.38,-170.52 250.86,-185 v1(245,-185)
PCLK: JP1.60
PIXELFLUSH: JP1.39 U6.19 | length 202.9
  Component Side w5: U6.19 78.13,-103.02 78.13,-50.61 v1@83.74,-45 ; v1(80,-45) v1@83.74,-45 ; v1@85,-46.26 v1@83.74,-45
  Solder Side w5: v1(80,-45) 103.33,-45 127.95,-69.62 JP1.39
PIXELVDD: C19.2 U5.2 U5.3 U6.21 | length 31.8
  Component Side w5: v1(65,-152.54) 86.37,-131.17 U6.21
ROW0: JP1.48 U6.8 | length 145.1
  Component Side w5: U6.8 -102.65,-52.5 -62.5,-52.5 v1(-45,-70)
  Solder Side w5: JP1.48 -49.21,-64.84 -45,-69.06 v1(-45,-70)
ROW1: JP1.47 U6.7 | length 162.2
  Component Side w5: U6.7 -103.5,-35 v1(-100,-35)
  Solder Side w5: v1(-100,-35) -92.5,-42.5 -49.17,-42.5 -26.87,-64.8 -26.87,-106 JP1.47
ROW2: JP1.46 U6.6 | length 187.1
  Component Side w5: U6.6 -123.49,-35.15 -105.83,-17.5 -77.5,-17.5 -75,-20 v1(-75,-25)
  Solder Side w5: v1(-75,-25) -67.5,-32.5 -45.02,-32.5 -9.84,-67.68 JP1.46
ROW3: JP1.45 U6.5 | length 206.7
  Component Side w5: U6.5 -105.19,0 v1(-100.09,0)
  Solder Side w5: v1(-100.09,0) -92.59,-7.5 -64.98,-7.5 -50.98,-21.5 -41.88,-21.5 9.84,-73.22 JP1.45
ROW4: JP1.44 U6.4 | length 233
  Component Side w5: U6.4 -106.04,17.5 -77.5,17.5 -75,15 v1(-75,10)
  Solder Side w5: v1(-75,10) -68.33,10 -46.83,-11.5 -37.64,-11.5 29.53,-78.67 JP1.44
ROW5: JP1.43 U6.3 | length 254.3
  Component Side w5: U6.3 -114.38,27.5 -69.17,27.5 -56.5,14.83 -56.5,-1.83 14.89,-73.22 v1(47.41,-73.22)
  Solder Side w5: v1(47.41,-73.22) 47.41,-96.86 JP1.43@50.63,-100.08
ROW6: JP1.42 U6.2 | length 284.9
  Component Side w5: U6.2 -122.73,37.5 -65.02,37.5 -42.5,14.98 -42.5,7.5 -40,10 v1(-40,10.2)
  Solder Side w5: v1(-40,10.2) -40,5 16.5,-51.5 49.02,-51.5 68.9,-71.37 JP1.42
ROW7: JP1.41 U6.1 | length 313.1
  Component Side w5: U6.1 -120.59,52.19 -52.19,52.19 -21.5,21.5 -21.5,-3.5 10,-35 v1(25,-35)
  Solder Side w5: v1(25,-35) 46.67,-35 88.58,-76.92 JP1.41
SHUTTER: JP1.24 U6.31 | length 93.5
  Component Side w5: U6.31 145.3,20 v1(170,20)
  Solder Side w5: JP1.24 167.32,22.68 v1(170,20) v1@170,14.65
VBAT: C5.2 C6.2 C13.2 C14.2 C18.2 C33.2 JP1.1 JP1.2 JP1.3 JP1.4 JP1.5 JP1.6 JP1.7 JP1.8 JP1.9 L2.1 L3.1 U2.10 U2.11 U2.12 U2.13 U3.3 U3.7 U4.1 U4.6 U5.4 U5.5 U9.A2
  other v1: -225,0 -225,25 -225,50 -225,75 -200,75 -175,75 -175,100 130,160 155,160 130,185
VLED: C1.2 C2.2 C10.2 C11.2 C12.2 C31.2 D1.A D2.A D3.A R3.2 U3.9 | length 307.1
  Component Side w15: D1.A@-295,-20 -283.86,-31.14 C2.2 ; C1.2 -88.15,294.29 D2.A@0,294.29 ; C31.2 283.86,-31.14 D3.A@295,-20
  other v1: -325,-65 325,-65 -325,-20 325,-20 -325,25 325,25 -255,240 -230,240.04 -205,240 -230,265 -205,265 -180,265 -80,295 80,295
VSYNC: JP1.58
pads on no net: JP1.0 U1.22 U2.4 U2.17@225,170 U5.1 U9.B2 U9.D2

## Polygon pours and split planes (outlines as drawn)
GND on Ground Plane (split plane): 105.26,311.52 135.58,305.49 165.15,296.52 193.7,284.69 220.96,270.12 246.66,252.95 270.55,233.35 292.4,211.49 312.01,187.6 329.18,161.91 343.75,134.65 355.57,106.1 364.55,76.52 370.57,46.21 373.6,15.45 373.6,-15.45 370.57,-46.21 364.55,-76.52 355.57,-106.1 343.75,-134.65 329.18,-161.91 312.01,-187.6 292.4,-211.49 270.55,-233.35 246.66,-252.95 220.96,-270.12 193.7,-284.69 165.15,-296.52 135.58,-305.49 105.26,-311.52 74.51,-314.55 -74.51,-314.55 -105.26,-311.52 -135.58,-305.49 -165.15,-296.52 -193.7,-284.69 -220.96,-270.12 -246.66,-252.95 -270.55,-233.35 -292.4,-211.49 -312.01,-187.6 -329.18,-161.91 -343.75,-134.65 -355.57,-106.1 -364.55,-76.52 -370.57,-46.21 -373.6,-15.45 -373.6,15.45 -370.57,46.21 -364.55,76.52 -355.57,106.1 -343.75,134.65 -329.18,161.91 -312.01,187.6 -292.4,211.49 -270.55,233.35 -246.66,252.95 -220.96,270.12 -193.7,284.69 -165.15,296.52 -135.58,305.49 -105.26,311.52 -74.51,314.55 74.51,314.55
VBAT on Power Plane (split plane): 95.92,205 96.23,203.44 97.12,202.12 102.12,197.12 102.78,196.67 103.44,196.23 105,195.92 133.31,195.92 235.92,93.31 235.92,65 235.92,-40 235.92,-80 236.23,-81.56 237.12,-82.88 242.12,-87.88 242.78,-88.33 243.44,-88.77 245,-89.08 290,-89.08 291.56,-88.77 292.88,-87.88 305,-75.77 349.64,-120.41 343.75,-134.65 329.18,-161.91 312.01,-187.6 292.4,-211.49 270.55,-233.35 246.66,-252.95 220.96,-270.12 193.7,-284.69 165.15,-296.52 135.58,-305.49 105.26,-311.52 74.51,-314.55 -74.51,-314.55 -105.26,-311.52 -135.58,-305.49 -165.15,-296.52 -193.7,-284.69 -220.96,-270.12 -246.66,-252.95 -270.55,-233.35 -292.4,-211.49 -312.01,-187.6 -329.18,-161.91 -343.75,-134.65 -349.64,-120.41 -303.31,-74.08 -250,-74.08 -248.44,-73.77 -247.12,-72.88 -237.12,-62.88 -236.23,-61.56 -235.92,-60 -235.92,65 -235.92,83.31 -127.39,191.84 -109.08,191.84 -107.52,192.15 -106.19,193.04 -97.12,202.12 -96.23,203.44 -95.92,205 -95.92,266.84 95.92,266.84
VLED on Power Plane (split plane): 105.26,311.52 135.58,305.49 165.15,296.52 193.7,284.69 220.96,270.12 246.66,252.95 270.55,233.35 292.4,211.49 312.01,187.6 329.18,161.91 343.75,134.65 355.57,106.1 364.55,76.52 370.57,46.21 373.6,15.45 373.6,-15.45 370.57,-46.21 364.55,-76.52 355.57,-106.1 353.02,-112.26 309.08,-68.31 309.08,90 308.77,91.56 307.88,92.88 126.96,273.81 125.64,274.69 124.08,275 -124.08,275 -125.64,274.69 -126.96,273.81 -307.88,92.88 -308.77,91.56 -309.08,90 -309.08,-68.31 -353.02,-112.26 -355.57,-106.1 -364.55,-76.52 -370.57,-46.21 -373.6,-15.45 -373.6,15.45 -370.57,46.21 -364.55,76.52 -355.57,106.1 -343.75,134.65 -329.18,161.91 -312.01,187.6 -292.4,211.49 -270.55,233.35 -246.66,252.95 -220.96,270.12 -193.7,284.69 -165.15,296.52 -135.58,305.49 -105.26,311.52 -74.51,314.55 74.51,314.55
NetD3_C on Power Plane (split plane): 300.92,88.31 300.92,-68.31 288.31,-80.92 246.69,-80.92 244.08,-78.31 244.08,-40 244.08,65 244.08,95 243.77,96.56 242.88,97.88 137.88,202.88 136.56,203.77 135,204.08 106.69,204.08 104.08,206.69 104.08,266.84 122.39,266.84
NetD1_C on Power Plane (split plane): -104.08,206.69 -110.77,200 -129.08,200 -130.64,199.69 -131.96,198.81 -242.88,87.88 -243.77,86.56 -244.08,85 -244.08,65 -244.08,-58.31 -251.69,-65.92 -300.92,-65.92 -300.92,88.31 -122.39,266.84 -104.08,266.84
3V3 on Power Plane (split plane): 70.92,83.31 70.92,-13.31 58.31,-25.92 -3.31,-25.92 -112.82,83.58 -112.82,94.19 -111.71,95.54 -111.07,96.32 -110.59,97.21 -109.22,99.79 -107.42,104.13 -106.27,107.9 -106.04,110.28 -105.89,111.82 -105.89,114.17 -105.89,116.52 -106.04,118.07 -106.27,120.44 -107.42,124.21 -109.22,128.55 -110.59,131.13 -111.07,132.03 -111.71,132.8 -112.82,134.15 -112.82,136.71 -93.6,155.92 -1.69,155.92

## Keep-outs
Keep-Out Layer:
  circle w0.5: c137.8,-161.42 r11.81
  circle w0.5: c-137.8,-161.42 r11.81
  circle w0.5: c-137.8,114.17 r11.81
  circle w0.5: c137.8,114.17 r11.81
  lines w0.5: -59.06,-334.65 cw(c-59.06,0) -59.06,334.65 59.06,334.65 cw(c59.06,0) 59.06,-334.65 -59.06,-334.65

## Other copper
Component Side:
  region net VLED: -275,35 -350,35 -350,-75 -275,-75
  region net VLED: 275,-75 350,-75 350,35 275,35
  region net VLED: -90,305 90,305 90,265 55,230 -70,230 -70,275 -80,285 -90,285
Solder Side:
  region net VBAT: 182.5,155 182.5,205 137.5,205 117.5,185 117.5,155
  region net GND: -10,0 25,0 55,30 55,85 -55,85 -80,110 -100,110 -115,95 -115,30 -40,30
Power Plane (plane layer: these items are gaps in the copper):
  lines w8: -370,-123.78 -358.78,-123.78 -305,-70 ; -100,270.92 -100,205 -109.08,195.92 -129.08,195.92 -240,85 -240,65 -240,-60 -250,-70 -305,-70 ; 100,270.92 100,205 105,200 135,200 240,95 240,65 240,-40 240,-80 245,-85 290,-85 305,-70 ; 370,-123.78 358.78,-123.78 305,-70 ; -305,-70 -305,90 -124.08,270.92 124.08,270.92 305,90 305,-70 ; -116.89,81.89 -5,-30 45,-30 60,-30 75,-15 75,85 0,160 -95.29,160 -116.89,138.4 -116.89,81.89